# Altium PCB BBB_Board_NEW_PLANES.PcbDoc (part 1 of 4)
Units mil, origin at the board's own origin, x right, y up, seen from the top; angles counter-clockwise.
Board outline 11000 x 5000 mil, 2 copper layers (Top Layer, Bottom Layer); 103 components, 383 nets, 1066 pads, 514 vias.
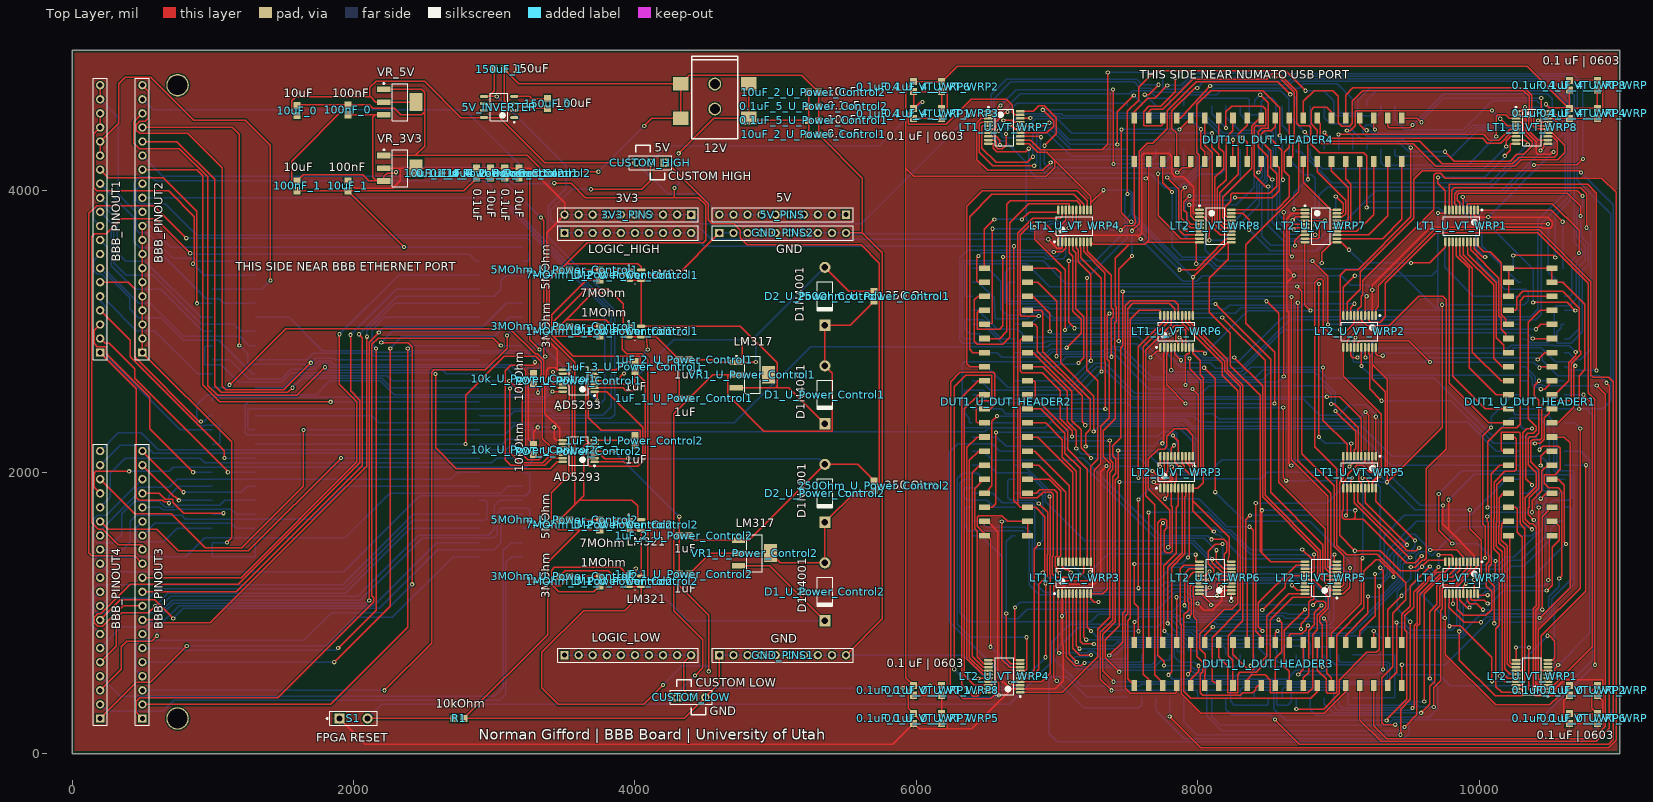
[diagram p0: Top Layer view]
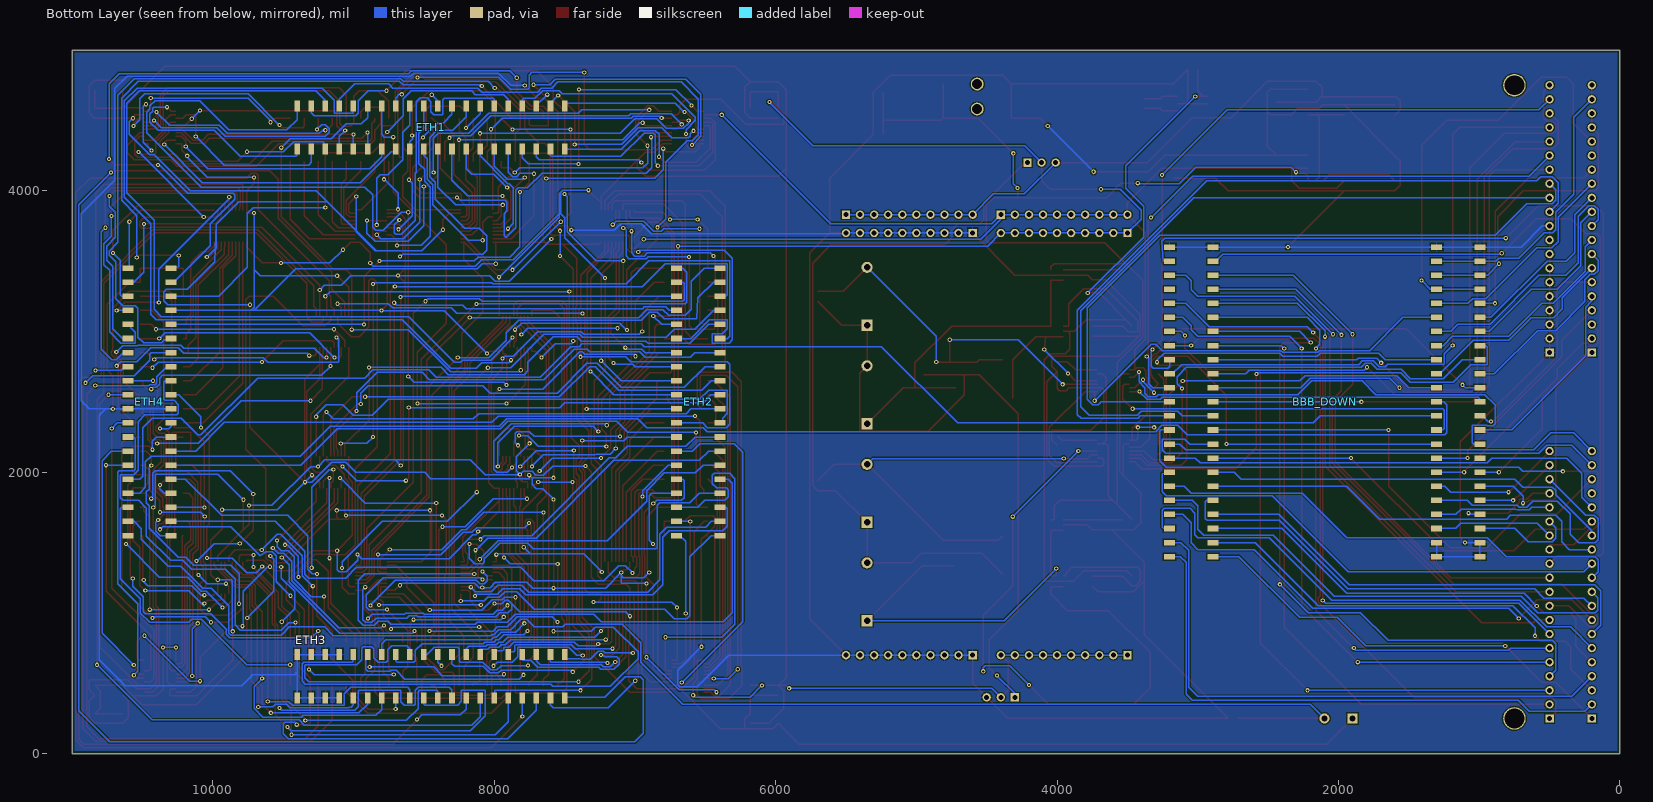
[diagram p1: Bottom Layer view, seen from below]

## Layer stack, top to bottom
Top Solder: solder mask 0.4, Solder Resist, Dk 3.5
Top Layer: signal copper 1.4
Dielectric 1: dielectric 12.6, FR-4, Dk 4.8
Bottom Layer: signal copper 1.4
Bottom Solder: solder mask 0.4, Solder Resist, Dk 3.5

## Board outline
0,0 11000,0 11000,5000 0,5000

## Design rules (kind name [scope] priority, off if disabled: settings)
BoardOutlineClearance [All] p1: gap=20
Clearance DifferentViaPadClearance [IsVia vs IsPad] p1: gap=25
Clearance SameViaPadClearance [IsVia vs IsPad] p2: gap=25
Clearance DifferentViaViaClearance [IsVia vs IsVia] p3: gap=25
Clearance SameViaViaClearance [IsVia vs IsVia] p4: gap=25
Clearance PadPadClearance [IsPad vs IsPad] p5: gap=6
Clearance GeneralClearance [All] p6: gap=8
HoleSize [All] p1: absolutevalues=TRUE maxlimit=150 minlimit=15 maxpercent=80.000 minpercent=20.000
HoleToHoleClearance [All] p1: gap=20 allowstackedmicrovias=TRUE
MinimumAnnularRing [All] p1: minimumring=7
PolygonConnect [All] p1: connectstyle=Relief reliefconductorwidth=10 reliefentries=4 polygonreliefangle="90 Angle" airgapwidth=10
RoutingVias [All] p1: holewidth=15 width=30 viastyle="Through Hole" minholewidth=28 minwidth=50 maxholewidth=28 maxwidth=50
SolderMaskExpansion [All] p1: expansion=4
Width [All] p1: maxlimit=10 minlimit=10 preferedwidth=10
28 further rules are at their usual default settings.

## Classes and differential pairs
component class BBB_Board: 3V3_PINS 5V_INVERTER 5V_PINS 10uF_0 10uF_1 12V 100nF_0 100nF_1 150uF_0 150uF_1 BBB_DOWN BBB_PINOUT1 BBB_PINOUT2 BBB_PINOUT3 BBB_PINOUT4 CUSTOM_HIGH CUSTOM_LOW GND_PINS1 GND_PINS2 LOGIC_HIGH LOGIC_LOW R1 S1 VR_3V3 VR_5V
component class U_DUT_HEADER1: DUT1_U_DUT_HEADER1
component class U_DUT_HEADER2: DUT1_U_DUT_HEADER2
component class U_DUT_HEADER3: DUT1_U_DUT_HEADER3
component class U_DUT_HEADER4: DUT1_U_DUT_HEADER4
component class U_NUMATO_HDR: ETH1 ETH2 ETH3 ETH4
component class U_Power_Control1: 0.1uF_4_U_Power_Control1 0.1uF_5_U_Power_Control1 1MOhm_U_Power_Control1 1uF_1_U_Power_Control1 1uF_2_U_Power_Control1 1uF_3_U_Power_Control1 3MOhm_U_Power_Control1 5MOhm_U_Power_Control1 7MOhm_U_Power_Control1 10k_U_Power_Control1 10uF_1_U_Power_Control1 10uF_2_U_Power_Control1 250Ohm_U_Power_Control1 D1_U_Power_Control1 D2_U_Power_Control1 LM1_U_Power_Control1 LM2_U_Power_Control1 POT_U_Power_Control1 VR1_U_Power_Control1
component class U_Power_Control2: 0.1uF_4_U_Power_Control2 0.1uF_5_U_Power_Control2 1MOhm_U_Power_Control2 1uF_1_U_Power_Control2 1uF_2_U_Power_Control2 1uF_3_U_Power_Control2 3MOhm_U_Power_Control2 5MOhm_U_Power_Control2 7MOhm_U_Power_Control2 10k_U_Power_Control2 10uF_1_U_Power_Control2 10uF_2_U_Power_Control2 250Ohm_U_Power_Control2 D1_U_Power_Control2 D2_U_Power_Control2 LM1_U_Power_Control2 LM2_U_Power_Control2 POT_U_Power_Control2 VR1_U_Power_Control2
component class U_VT_WRP1: 0.1uF_0_U_VT_WRP1 0.1uF_4_U_VT_WRP1 LT1_U_VT_WRP1 LT2_U_VT_WRP1
component class U_VT_WRP2: 0.1uF_0_U_VT_WRP2 0.1uF_4_U_VT_WRP2 LT1_U_VT_WRP2 LT2_U_VT_WRP2
component class U_VT_WRP3: 0.1uF_0_U_VT_WRP3 0.1uF_4_U_VT_WRP3 LT1_U_VT_WRP3 LT2_U_VT_WRP3
component class U_VT_WRP4: 0.1uF_0_U_VT_WRP4 0.1uF_4_U_VT_WRP4 LT1_U_VT_WRP4 LT2_U_VT_WRP4
component class U_VT_WRP5: 0.1uF_0_U_VT_WRP5 0.1uF_4_U_VT_WRP5 LT1_U_VT_WRP5 LT2_U_VT_WRP5
component class U_VT_WRP6: 0.1uF_0_U_VT_WRP6 0.1uF_4_U_VT_WRP6 LT1_U_VT_WRP6 LT2_U_VT_WRP6
component class U_VT_WRP7: 0.1uF_0_U_VT_WRP7 0.1uF_4_U_VT_WRP7 LT1_U_VT_WRP7 LT2_U_VT_WRP7
component class U_VT_WRP8: 0.1uF_0_U_VT_WRP8 0.1uF_4_U_VT_WRP8 LT1_U_VT_WRP8 LT2_U_VT_WRP8
net class FPGA_SIG[127..0]: FPGA_SIG0 FPGA_SIG1 FPGA_SIG2 FPGA_SIG3 FPGA_SIG4 FPGA_SIG5 FPGA_SIG6 FPGA_SIG7 FPGA_SIG8 FPGA_SIG9 FPGA_SIG10 FPGA_SIG11 FPGA_SIG12 FPGA_SIG13 FPGA_SIG14 FPGA_SIG15 FPGA_SIG16 FPGA_SIG17 FPGA_SIG18 FPGA_SIG19 FPGA_SIG20 FPGA_SIG21 FPGA_SIG22 FPGA_SIG23 FPGA_SIG24 FPGA_SIG25 FPGA_SIG26 FPGA_SIG27 FPGA_SIG28 FPGA_SIG29 FPGA_SIG30 FPGA_SIG31 FPGA_SIG32 FPGA_SIG33 FPGA_SIG34 FPGA_SIG35 FPGA_SIG36 FPGA_SIG37 FPGA_SIG38 FPGA_SIG39 FPGA_SIG40 FPGA_SIG41 FPGA_SIG42 FPGA_SIG43 FPGA_SIG44 FPGA_SIG45 FPGA_SIG46 FPGA_SIG47 FPGA_SIG48 FPGA_SIG49 FPGA_SIG50 FPGA_SIG51 FPGA_SIG52 FPGA_SIG53 FPGA_SIG54 FPGA_SIG55 FPGA_SIG56 FPGA_SIG57 FPGA_SIG58 FPGA_SIG59 FPGA_SIG60 FPGA_SIG61 FPGA_SIG62 FPGA_SIG63 FPGA_SIG64 FPGA_SIG65 FPGA_SIG66 FPGA_SIG67 FPGA_SIG68 FPGA_SIG69 FPGA_SIG70 FPGA_SIG71 FPGA_SIG72 FPGA_SIG73 FPGA_SIG74 FPGA_SIG75 FPGA_SIG76 FPGA_SIG77 FPGA_SIG78 FPGA_SIG79 FPGA_SIG80 FPGA_SIG81 FPGA_SIG82 FPGA_SIG83 FPGA_SIG84 FPGA_SIG85 FPGA_SIG86 FPGA_SIG87 FPGA_SIG88 FPGA_SIG89 FPGA_SIG90 FPGA_SIG91 FPGA_SIG92 FPGA_SIG93 FPGA_SIG94 FPGA_SIG95 FPGA_SIG96 FPGA_SIG97 FPGA_SIG98 FPGA_SIG99 FPGA_SIG100 FPGA_SIG101 FPGA_SIG102 FPGA_SIG103 FPGA_SIG104 FPGA_SIG105 FPGA_SIG106 FPGA_SIG107 FPGA_SIG108 FPGA_SIG109 FPGA_SIG110 FPGA_SIG111 FPGA_SIG112 FPGA_SIG113 FPGA_SIG114 FPGA_SIG115 FPGA_SIG116 FPGA_SIG117 FPGA_SIG118 FPGA_SIG119 FPGA_SIG120 FPGA_SIG121 FPGA_SIG122 FPGA_SIG123 FPGA_SIG124 FPGA_SIG125 FPGA_SIG126 FPGA_SIG127
net class OVCC_B[127..0]: OVCC_B0 OVCC_B1 OVCC_B2 OVCC_B3 OVCC_B4 OVCC_B5 OVCC_B6 OVCC_B7 OVCC_B8 OVCC_B9 OVCC_B10 OVCC_B11 OVCC_B12 OVCC_B13 OVCC_B14 OVCC_B15 OVCC_B16 OVCC_B17 OVCC_B18 OVCC_B19 OVCC_B20 OVCC_B21 OVCC_B22 OVCC_B23 OVCC_B24 OVCC_B25 OVCC_B26 OVCC_B27 OVCC_B28 OVCC_B29 OVCC_B30 OVCC_B31 OVCC_B32 OVCC_B33 OVCC_B34 OVCC_B35 OVCC_B36 OVCC_B37 OVCC_B38 OVCC_B39 OVCC_B40 OVCC_B41 OVCC_B42 OVCC_B43 OVCC_B44 OVCC_B45 OVCC_B46 OVCC_B47 OVCC_B48 OVCC_B49 OVCC_B50 OVCC_B51 OVCC_B52 OVCC_B53 OVCC_B54 OVCC_B55 OVCC_B56 OVCC_B57 OVCC_B58 OVCC_B59 OVCC_B60 OVCC_B61 OVCC_B62 OVCC_B63 OVCC_B64 OVCC_B65 OVCC_B66 OVCC_B67 OVCC_B68 OVCC_B69 OVCC_B70 OVCC_B71 OVCC_B72 OVCC_B73 OVCC_B74 OVCC_B75 OVCC_B76 OVCC_B77 OVCC_B78 OVCC_B79 OVCC_B80 OVCC_B81 OVCC_B82 OVCC_B83 OVCC_B84 OVCC_B85 OVCC_B86 OVCC_B87 OVCC_B88 OVCC_B89 OVCC_B90 OVCC_B91 OVCC_B92 OVCC_B93 OVCC_B94 OVCC_B95 OVCC_B96 OVCC_B97 OVCC_B98 OVCC_B99 OVCC_B100 OVCC_B101 OVCC_B102 OVCC_B103 OVCC_B104 OVCC_B105 OVCC_B106 OVCC_B107 OVCC_B108 OVCC_B109 OVCC_B110 OVCC_B111 OVCC_B112 OVCC_B113 OVCC_B114 OVCC_B115 OVCC_B116 OVCC_B117 OVCC_B118 OVCC_B119 OVCC_B120 OVCC_B121 OVCC_B122 OVCC_B123 OVCC_B124 OVCC_B125 OVCC_B126 OVCC_B127
channel class DUT_HEADER: U_DUT_HEADER1 U_DUT_HEADER2 U_DUT_HEADER3 U_DUT_HEADER4
channel class POW_CONT: U_Power_Control1 U_Power_Control2
channel class VT_WRP: U_VT_WRP1 U_VT_WRP2 U_VT_WRP3 U_VT_WRP4 U_VT_WRP5 U_VT_WRP6 U_VT_WRP7 U_VT_WRP8

## Components (designator, comment, footprint, x,y, rotation, side; value= is the part's Value field where it differs from the comment)
0.1uF_0_U_VT_WRP1 "0.1uF_0603" 0.1uF_0603 5980,450 r90 top (schematic designator 0.1uF_0)
0.1uF_0_U_VT_WRP2 "0.1uF_0603" 0.1uF_0603 10640,450 r90 top (schematic designator 0.1uF_0)
0.1uF_0_U_VT_WRP3 "0.1uF_0603" 0.1UF_0603 10840,450 r90 top (schematic designator 0.1uF_0)
0.1uF_0_U_VT_WRP4 "0.1uF_0603" 0.1UF_0603 10840,250 r90 top (schematic designator 0.1uF_0)
0.1uF_0_U_VT_WRP5 "0.1uF_0603" 0.1uF_0603 6180,250 r270 top (schematic designator 0.1uF_0)
0.1uF_0_U_VT_WRP6 "0.1uF_0603" 0.1uF_0603 10640,250 r90 top (schematic designator 0.1uF_0)
0.1uF_0_U_VT_WRP7 "0.1uF_0603" 0.1uF_0603 5980,250 r90 top (schematic designator 0.1uF_0)
0.1uF_0_U_VT_WRP8 "0.1uF_0603" 0.1UF_0603 6180,450 r90 top (schematic designator 0.1uF_0)
0.1uF_4_U_Power_Control1 "0.1uF_0603" 0.1UF_0603 3075,4125 r90 top (schematic designator 0.1uF_4)
0.1uF_4_U_Power_Control2 "0.1uF_0603" 0.1UF_0603 2975,4125 r90 top (schematic designator 0.1uF_4)
0.1uF_4_U_VT_WRP1 "0.1uF_0603" 0.1UF_0603 5980,4548.98 r270 top (schematic designator 0.1uF_4)
0.1uF_4_U_VT_WRP2 "0.1uF_0603" 0.1uF_0603 6180,4740 r90 top (schematic designator 0.1uF_4)
0.1uF_4_U_VT_WRP3 "0.1uF_0603" 0.1uF_0603 6180,4550 r270 top (schematic designator 0.1uF_4)
0.1uF_4_U_VT_WRP4 "0.1uF_0603" 0.1uF_0603 10640,4550 r90 top (schematic designator 0.1uF_4)
0.1uF_4_U_VT_WRP5 "0.1uF_0603" 0.1UF_0603 10840,4750 r270 top (schematic designator 0.1uF_4)
0.1uF_4_U_VT_WRP6 "0.1uF_0603" 0.1uF_0603 5980,4740 r90 top (schematic designator 0.1uF_4)
0.1uF_4_U_VT_WRP7 "0.1uF_0603" 0.1uF_0603 10840,4550 r90 top (schematic designator 0.1uF_4)
0.1uF_4_U_VT_WRP8 "0.1uF_0603" 0.1uF_0603 10640,4750 r270 top (schematic designator 0.1uF_4)
0.1uF_5_U_Power_Control1 "0.1uF_0603" 0.1UF_0603 5270,4500 r180 top (schematic designator 0.1uF_5)
0.1uF_5_U_Power_Control2 "0.1uF_0603" 0.1UF_0603 5270,4600 r180 top (schematic designator 0.1uF_5)
1MOhm_U_Power_Control1 "RNCS0603BKE10K0" 0.1UF_0603 3750,3002 r90 top (schematic designator 1MOhm)
1MOhm_U_Power_Control2 "RNCS0603BKE10K0" 0.1UF_0603 3750,1225 r90 top (schematic designator 1MOhm)
1uF_1_U_Power_Control1 "0.1uF_0603" 0.1UF_0603 4350,2525 r0 top (schematic designator 1uF_1)
1uF_1_U_Power_Control2 "0.1uF_0603" 0.1UF_0603 4350,1275 r0 top (schematic designator 1uF_1)
1uF_2_U_Power_Control1 "0.1uF_0603" 0.1UF_0603 4350,2800 r0 top (schematic designator 1uF_2)
1uF_2_U_Power_Control2 "0.1uF_0603" 0.1UF_0603 4350,1550 r0 top (schematic designator 1uF_2)
1uF_3_U_Power_Control1 "0.1uF_0603" 0.1UF_0603 4000,2750 r90 top (schematic designator 1uF_3)
1uF_3_U_Power_Control2 "0.1uF_0603" 0.1UF_0603 4000,2225 r90 top (schematic designator 1uF_3)
3MOhm_U_Power_Control1 "RNCS0603BKE10K0" 0.1UF_0603 3500,3037 r180 top (schematic designator 3MOhm)
3MOhm_U_Power_Control2 "RNCS0603BKE10K0" 0.1UF_0603 3500,1260 r180 top (schematic designator 3MOhm)
3V3_PINS "Header 10" HDR1X10 4400,3830 r180 top
5MOhm_U_Power_Control1 "RNCS0603BKE10K0" 0.1UF_0603 3500,3437 r180 top (schematic designator 5MOhm)
5MOhm_U_Power_Control2 "RNCS0603BKE10K0" 0.1UF_0603 3500,1661 r180 top (schematic designator 5MOhm)
5V_INVERTER "LTC660CS8#PBF" SOIC127P600X175-8N 3035,4595 r180 top
5V_PINS "Header 10" HDR1X10 5500,3830 r180 top
7MOhm_U_Power_Control1 "RNCS0603BKE10K0" 0.1UF_0603 3750,3402 r90 top (schematic designator 7MOhm)
7MOhm_U_Power_Control2 "RNCS0603BKE10K0" 0.1UF_0603 3750,1626 r90 top (schematic designator 7MOhm)
10k_U_Power_Control1 "RNCS0603BKE10K0" 0.1uF_0603 3280,2665 r90 top (schematic designator 10k)
10k_U_Power_Control2 "RNCS0603BKE10K0" 0.1uF_0603 3280,2160 r90 top (schematic designator 10k)
10uF_0 "0.1uF_0603" 0.1uF_0603 1600,4570 r270 top
10uF_1 "0.1uF_0603" 0.1uF_0603 1960,4035 r90 top
10uF_1_U_Power_Control1 "0.1uF_0603" 0.1UF_0603 2875,4125 r90 top (schematic designator 10uF_1)
10uF_1_U_Power_Control2 "0.1uF_0603" 0.1UF_0603 3175,4125 r90 top (schematic designator 10uF_1)
10uF_2_U_Power_Control1 "0.1uF_0603" 0.1UF_0603 5270,4400 r180 top (schematic designator 10uF_2)
10uF_2_U_Power_Control2 "0.1uF_0603" 0.1UF_0603 5270,4700 r180 top (schematic designator 10uF_2)
12V "PJ-002BH-SMT-TR" CP-002BHPJCT-ND 4745,4955 r180 top
100nF_0 "0.1uF_0603" 0.1uF_0603 1960,4575 r270 top
100nF_1 "0.1uF_0603" 0.1uF_0603 1600,4035 r90 top
150uF_0 "0.1uF_0603" 0.1uF_0603 3380,4620 r270 top
150uF_1 "0.1uF_0603" 0.1uF_0603 3035,4865 r180 top
250Ohm_U_Power_Control1 "RNCS0603BKE10K0" 0.1UF_0603 5700,3250 r270 top (schematic designator 250Ohm)
250Ohm_U_Power_Control2 "RNCS0603BKE10K0" 0.1UF_0603 5700,1904 r270 top (schematic designator 250Ohm)
BBB_DOWN "BBB_Pin" BBB_PIN 3200,3600 r180 bottom
BBB_PINOUT1 "Header 20" HDR1X20 200,2850 r90 top
BBB_PINOUT2 "Header 20" HDR1X20 500,2850 r90 top
BBB_PINOUT3 "Header 20" HDR1X20 500,250 r90 top
BBB_PINOUT4 "Header 20" HDR1X20 200,250 r90 top
CUSTOM_HIGH "Header 3" HDR1X3 4210,4200 r180 top
CUSTOM_LOW "Header 3" HDR1X3 4300,400 r0 top
D1_U_Power_Control1 "Diode 1N4001" DO-41 5350,2550 r270 top (schematic designator D1)
D1_U_Power_Control2 "Diode 1N4001" DO-41 5350,1150 r270 top (schematic designator D1)
D2_U_Power_Control1 "Diode 1N4001" DO-41 5350,3250 r270 top (schematic designator D2)
D2_U_Power_Control2 "Diode 1N4001" DO-41 5350,1850 r270 top (schematic designator D2)
DUT1_U_DUT_HEADER1 "ADAFRUIT_HEADER" FEMALE_HEADER_SMD 10362.5,2500 r90 top (schematic designator DUT1)
DUT1_U_DUT_HEADER2 "ADAFRUIT_HEADER" FEMALE_HEADER_SMD 6637.5,2500 r270 top (schematic designator DUT1)
DUT1_U_DUT_HEADER3 "ADAFRUIT_HEADER" FEMALE_HEADER_SMD 8500,637.5 r0 top (schematic designator DUT1)
DUT1_U_DUT_HEADER4 "ADAFRUIT_HEADER" FEMALE_HEADER_SMD 8500,4362.5 r180 top (schematic designator DUT1)
ETH1 "ADAFRUIT_HEADER" FEMALE_HEADER_SMD 8450,4450 r180 bottom
ETH2 "ADAFRUIT_HEADER" FEMALE_HEADER_SMD 6550,2500 r90 bottom
ETH3 "ADAFRUIT_HEADER" FEMALE_HEADER_SMD 8450,550 r0 bottom
ETH4 "ADAFRUIT_HEADER" FEMALE_HEADER_SMD 10450,2500 r270 bottom
GND_PINS1 "Header 10" HDR1X10 4600,700 r0 top
GND_PINS2 "Header 10" HDR1X10 4600,3700 r0 top
LM1_U_Power_Control1 "LM321MF/NOPB" OP_AMP 4000,3000 r0 top (schematic designator LM1)
LM1_U_Power_Control2 "LM321MF/NOPB" OP_AMP 4000,1225 r0 top (schematic designator LM1)
LM2_U_Power_Control1 "LM321MF/NOPB" OP_AMP 4000,3400 r0 top (schematic designator LM2)
LM2_U_Power_Control2 "LM321MF/NOPB" OP_AMP 4000,1625 r0 top (schematic designator LM2)
LOGIC_HIGH "Header 10" HDR1X10 3500,3700 r0 top
LOGIC_LOW "Header 10" HDR1X10 3500,700 r0 top
LT1_U_VT_WRP1 "8-Chanel Level Translator" 8-BIT_LEVEL 9875,3750 r270 top (schematic designator LT1)
LT1_U_VT_WRP2 "8-Chanel Level Translator" 8-BIT_LEVEL 9875,1250 r270 top (schematic designator LT1)
LT1_U_VT_WRP3 "8-Chanel Level Translator" 8-BIT_LEVEL 7125,1250 r90 top (schematic designator LT1)
LT1_U_VT_WRP4 "8-Chanel Level Translator" 8-BIT_LEVEL 7125,3750 r90 top (schematic designator LT1)
LT1_U_VT_WRP5 "8-Chanel Level Translator" 8-BIT_LEVEL 9150,2000 r270 top (schematic designator LT1)
LT1_U_VT_WRP6 "8-Chanel Level Translator" 8-BIT_LEVEL 7850,3000 r90 top (schematic designator LT1)
LT1_U_VT_WRP7 "8-Chanel Level Translator" 8-BIT_LEVEL 6625,4450 r0 top (schematic designator LT1)
LT1_U_VT_WRP8 "8-Chanel Level Translator" 8-BIT_LEVEL 10375,4450 r0 top (schematic designator LT1)
LT2_U_VT_WRP1 "8-Chanel Level Translator" 8-BIT_LEVEL 10375,550 r180 top (schematic designator LT2)
LT2_U_VT_WRP2 "8-Chanel Level Translator" 8-BIT_LEVEL 9150,3000 r270 top (schematic designator LT2)
LT2_U_VT_WRP3 "8-Chanel Level Translator" 8-BIT_LEVEL 7850,2000 r90 top (schematic designator LT2)
LT2_U_VT_WRP4 "8-Chanel Level Translator" 8-BIT_LEVEL 6625,550 r180 top (schematic designator LT2)
LT2_U_VT_WRP5 "8-Chanel Level Translator" 8-BIT_LEVEL 8875,1250 r180 top (schematic designator LT2)
LT2_U_VT_WRP6 "8-Chanel Level Translator" 8-BIT_LEVEL 8125,1250 r180 top (schematic designator LT2)
LT2_U_VT_WRP7 "8-Chanel Level Translator" 8-BIT_LEVEL 8875,3750 r0 top (schematic designator LT2)
LT2_U_VT_WRP8 "8-Chanel Level Translator" 8-BIT_LEVEL 8125,3750 r0 top (schematic designator LT2)
POT_U_Power_Control1 "Digital Pot" DIG_POT 3600,2650 r180 top (schematic designator POT)
POT_U_Power_Control2 "Digital Pot" DIG_POT 3600,2150 r180 top (schematic designator POT)
R1 "RNCS0603BKE10K0" 0.1UF_0603 2750,250 r180 top
S1 "SW-PB" SPST-2 2000,250 r0 top
VR1_U_Power_Control1 "Voltage Regulator" VOLT_REG 4835,2692 r0 top (schematic designator VR1)
VR1_U_Power_Control2 "Voltage Regulator" VOLT_REG 4850,1425 r0 top (schematic designator VR1)
VR_3V3 "Voltage Regulator" volt_reg 2330,4160 r0 top
VR_5V "Voltage Regulator" volt_reg 2330,4630 r0 top

## Footprints (in the part's own frame and the unit in brackets; to place one, negate y for a bottom-side part, rotate by r counter-clockwise, add the part's x,y. Pads: shape width x height; smd on the part's side, far side on the other; paste and mask are expansions set on the pad)
0.1uF_0603 [mil]
  rect 50x50 smd: 1(-35,0) 2(35,0)
0.1UF_0603 [mil]
  rect 50x50 smd: 1(-35,0) 2(35,0)
8-BIT_LEVEL [mm]
  oval 1.6x0.45 smd: 1(-2.875,2.925) 2(-2.875,2.275) 3(-2.875,1.625) 4(-2.875,0.975) 5(-2.875,0.325) 6(-2.875,-0.325) 7(-2.875,-0.975) 8(-2.875,-1.625) 9(-2.875,-2.275) 10(-2.875,-2.925) 11(2.875,-2.925) 12(2.875,-2.275) 13(2.875,-1.625) 14(2.875,-0.975) 15(2.875,-0.325) 16(2.875,0.325) 17(2.875,0.975) 18(2.875,1.625) 19(2.875,2.275) 20(2.875,2.925)
  silkscreen extent -3,-3.3 1.67,3.78, body extent -2.25,-3.3 2.25,3.3, height 1.1
BBB_PIN [mm]
  rect 2x1 smd: 1(55.986,0) 2(48.186,0) 3(55.986,-2.54) 4(48.186,-2.54) 5(55.986,-5.08) 6(48.186,-5.08) 7(55.986,-7.62) 8(48.186,-7.62) 9(55.986,-10.16) 10(48.186,-10.16) 11(55.986,-12.7) 12(48.186,-12.7) 13(55.986,-15.24) 14(48.186,-15.24) 15(55.986,-17.78) 16(48.186,-17.78) 17(55.986,-20.32) 18(48.186,-20.32) 19(55.986,-22.86) 20(48.186,-22.86) 21(55.986,-25.4) 22(48.186,-25.4) 23(55.986,-27.94) 24(48.186,-27.94) 25(55.986,-30.48) 26(48.186,-30.48) 27(55.986,-33.02) 28(48.186,-33.02) 29(55.986,-35.56) 30(48.186,-35.56) 31(55.986,-38.1) 32(48.186,-38.1) 33(55.986,-40.64) 34(48.186,-40.64) 35(55.986,-43.18) 36(48.186,-43.18) 37(55.986,-45.72) 38(48.186,-45.72) 39(55.986,-48.26) 40(48.186,-48.26) 41(55.986,-50.8) 42(48.186,-50.8) 43(55.986,-53.34) 44(48.186,-53.34) 45(55.986,-55.88) 46(48.186,-55.88) 47(7.8,0) 48(0,0) 49(7.8,-2.54) 50(0,-2.54) 51(7.8,-5.08) 52(0,-5.08) 53(7.8,-7.62) 54(0,-7.62) 56(0,-10.16) 57(7.8,-12.7) 58(0,-12.7) 59(7.8,-15.24) 60(0,-15.24) 61(7.8,-17.78) 62(0,-17.78) 63(7.8,-20.32) 64(0,-20.32) 65(7.8,-22.86) 66(0,-22.86) 67(7.8,-25.4) 68(0,-25.4) 69(7.8,-27.94) 70(0,-27.94) 71(7.8,-30.48) 72(0,-30.48) 73(7.8,-33.02) 74(0,-33.02) 75(7.8,-35.56) 76(0,-35.56) 77(7.8,-38.1) 78(0,-38.1) 79(7.8,-40.64) 80(0,-40.64) 81(7.8,-43.18) 82(0,-43.18) 83(7.8,-45.72) 84(0,-45.72) 85(7.8,-48.26) 86(0,-48.26) 87(7.8,-50.8) 88(0,-50.8) 89(7.8,-53.34) 90(0,-53.34) 91(7.8,-55.88) 92(0,-55.88)
  rect 2x1 smd mask+0.102: 55(7.8,-10.16)
CP-002BHPJCT-ND [mm] "barrel jack"
  rect 2.8x2.4 smd: 1(-1.651,11.176) 1(-1.651,4.953) 2(10.668,11.176) 2(10.668,4.953)
  round 2.311 hole 1.8 unplated: H(4.5,9.5) H(4.5,5)
  silkscreen extent 0.38,0 8.64,14.86
DIG_POT [mm]
  oval 1.55x0.45 smd: 1(-2.875,1.95) 2(-2.875,1.3) 3(-2.875,0.65) 4(-2.875,0) 5(-2.875,-0.65) 6(-2.875,-1.3) 7(-2.875,-1.95) 8(2.875,-1.95) 9(2.875,-1.3) 10(2.875,-0.65) 11(2.875,0) 12(2.875,0.65) 13(2.875,1.3) 14(2.875,1.95)
  silkscreen extent -3,-2.55 1.7,2.8, body extent -2.25,-2.55 2.25,2.55, height 1.2
DO-41 [mm] "Diode, Axial; Body 5.2 x 2.7 mm (LxDia. max), Lead Dia. 0.86 mm (max)"
  round 2 hole 1.2: 1(-5.23,0)
  rect 2x2 hole 1.2: 2(5.23,0)
  silkscreen extent -2.65,-1.4 2.75,1.4
FEMALE_HEADER_SMD [mm]
  rect 1x2 smd: 1(-24.13,-3.9) 2(-21.59,-3.9) 3(-19.05,-3.9) 4(-16.51,-3.9) 5(-13.97,-3.9) 6(-11.43,-3.9) 7(-8.89,-3.9) 8(-6.35,-3.9) 9(-3.81,-3.9) 10(-1.27,-3.9) 11(1.27,-3.9) 12(3.81,-3.9) 13(6.35,-3.9) 14(8.89,-3.9) 15(11.43,-3.9) 16(13.97,-3.9) 17(16.51,-3.9) 18(19.05,-3.9) 19(21.59,-3.9) 20(24.13,-3.9) 21(24.13,3.9) 22(21.59,3.9) 23(19.05,3.9) 24(16.51,3.9) 25(13.97,3.9) 26(11.43,3.9) 27(8.89,3.9) 28(6.35,3.9) 29(3.81,3.9) 30(1.27,3.9) 31(-1.27,3.9) 32(-3.81,3.9) 33(-6.35,3.9) 34(-8.89,3.9) 35(-11.43,3.9) 36(-13.97,3.9) 37(-16.51,3.9) 38(-19.05,3.9) 39(-21.59,3.9) 40(-24.13,3.9)
HDR1X3 [mm] "Connector; Header; 3 Position"
  rect 1.5x1.5 hole 0.9: 1(0,0)
  round 1.5 hole 0.9: 2(2.54,0) 3(5.08,0)
  silkscreen extent -1.27,-1.27 6.35,1.27
HDR1X10 [mm] "Connector; Header; 10 Position"
  rect 1.5x1.5 hole 0.9: 1(0,0)
  round 1.5 hole 0.9: 2(2.54,0) 3(5.08,0) 4(7.62,0) 5(10.16,0) 6(12.7,0) 7(15.24,0) 8(17.78,0) 9(20.32,0) 10(22.86,0)
  silkscreen extent -1.27,-1.27 24.13,1.27
HDR1X20 [mm] "Connector; Header; 20 Position"
  rect 1.5x1.5 hole 0.9: 1(0,0)
  round 1.5 hole 0.9: 2(2.54,0) 3(5.08,0) 4(7.62,0) 5(10.16,0) 6(12.7,0) 7(15.24,0) 8(17.78,0) 9(20.32,0) 10(22.86,0) 11(25.4,0) 12(27.94,0) 13(30.48,0) 14(33.02,0) 15(35.56,0) 16(38.1,0) 17(40.64,0) 18(43.18,0) 19(45.72,0) 20(48.26,0)
  silkscreen extent -1.27,-1.27 49.53,1.27
OP_AMP [mm]
  oval 1.55x0.6 smd: 1(-1.125,0.95) 2(-1.125,0) 3(-1.125,-0.95) 4(1.125,-0.95) 5(1.125,0.95)
  silkscreen extent -1.25,-1.55 0.05,1.92, body extent -0.9,-1.55 0.9,1.55, height 1.45
SOIC127P600X175-8N [mm] "SOIC, 8-Leads, Body 4.90x3.90mm, Pitch 1.27mm, IPC Medium Density"
  oval 1.45x0.6 smd: 1(-2.725,1.905) 2(-2.725,0.635) 3(-2.725,-0.635) 4(-2.725,-1.905) 5(2.725,-1.905) 6(2.725,-0.635) 7(2.725,0.635) 8(2.725,1.905)
  silkscreen extent -2.85,-2.5 1.6,2.88, body extent -2,-2.5 2,2.5, height 1.76
SPST-2 [mm] "Switch; 2 Leads"
  rect 1.85x1.85 hole 1.1: 1(-2.54,0)
  round 1.85 hole 1.1: 2(2.54,0)
  silkscreen extent -4.89,-1.27 4.28,1.27
VOLT_REG [mm] "SOT223, 4-Leads, Body 6.50x7.00mm (avg), Pitch 2.30mm, IPC Medium Density"
  rect 2.4x1 smd: 1(-2.9,2.3) 2(-2.9,0) 3(-2.9,-2.3)
  rect 2.4x3.2 smd: 4(2.9,0)
  silkscreen extent -3.02,-3.35 1.4,3.47, body extent -1.85,-3.35 1.85,3.35, height 1.8
volt_reg [mm] "SOT223, 4-Leads, Body 6.50x7.00mm (avg), Pitch 2.30mm, IPC Medium Density"
  rect 2.4x1 smd: 1(-2.9,2.3) 2(-2.9,0) 3(-2.9,-2.3)
  rect 2.4x3.2 smd: 4(2.9,0)
  silkscreen extent -3.02,-3.35 1.4,3.47, body extent -1.85,-3.35 1.85,3.35, height 1.8

## Part data
1MOhm_U_Power_Control1 1MOhm_U_Power_Control2 3MOhm_U_Power_Control1 3MOhm_U_Power_Control2 5MOhm_U_Power_Control1 5MOhm_U_Power_Control2 7MOhm_U_Power_Control1 7MOhm_U_Power_Control2 10k_U_Power_Control1 10k_U_Power_Control2 250Ohm_U_Power_Control1 250Ohm_U_Power_Control2 R1: "RES 10K OHM 1/16W 0.1% 0603"
3V3_PINS 5V_PINS GND_PINS1 GND_PINS2 LOGIC_HIGH LOGIC_LOW: "Header, 10-Pin"
5V_INVERTER: "IC REG SWTCHD CAP INV 0.1A 8SOIC"
12V: "CONN POWER JACK 2.5X5.5MM HI CUR"
BBB_PINOUT1 BBB_PINOUT2 BBB_PINOUT3 BBB_PINOUT4: "Header, 20-Pin"
CUSTOM_HIGH CUSTOM_LOW: "Header, 3-Pin"
D1_U_Power_Control1 D1_U_Power_Control2 D2_U_Power_Control1 D2_U_Power_Control2: "1 Amp General Purpose Rectifier"
DUT1_U_DUT_HEADER1 DUT1_U_DUT_HEADER2 DUT1_U_DUT_HEADER3 DUT1_U_DUT_HEADER4 ETH1 ETH2 ETH3 ETH4: "Extra tall female header (SMD)"
LM1_U_Power_Control1 LM1_U_Power_Control2 LM2_U_Power_Control1 LM2_U_Power_Control2: "IC OPAMP GP 1MHZ SOT23-5"
LT1_U_VT_WRP1 LT1_U_VT_WRP2 LT1_U_VT_WRP3 LT1_U_VT_WRP4 LT1_U_VT_WRP5 LT1_U_VT_WRP6 LT1_U_VT_WRP7 LT1_U_VT_WRP8 LT2_U_VT_WRP1 LT2_U_VT_WRP2 LT2_U_VT_WRP3 LT2_U_VT_WRP4 LT2_U_VT_WRP5 LT2_U_VT_WRP6 LT2_U_VT_WRP7 LT2_U_VT_WRP8: "IC XLATR LEVEL BIDIR 8CH 20TSSOP"
POT_U_Power_Control1 POT_U_Power_Control2: "IC DGTL POT 1024POS 20K 14TSSOP"
S1: "Switch"
VR1_U_Power_Control1 VR1_U_Power_Control2 VR_3V3 VR_5V: "IC REG LDO ADJ 1.5A DDPAK"

## Free pads (board coordinates)
  round 160 hole 140 unplated: 0(750,250) 0(750,4750)

## Via types
v1: diameter 30, hole 15, Top Layer to Bottom Layer, 514 vias

## Nets (pads, with @x,y where several pads share a name; then routed paths per layer and width w, separated by ;. In a path a pad name is that pad's centre, name@x,y a point inside that pad or via, vN(x,y) a via of type N, cw(c..) or ccw(c..) an arc to the next point about the centre after c; other vN are vias at no path point)
3V3_W_U_Power_Control1: 0.1uF_0_U_VT_WRP1.1 0.1uF_0_U_VT_WRP2.1 0.1uF_0_U_VT_WRP3.1 0.1uF_0_U_VT_WRP4.1 0.1uF_0_U_VT_WRP5.1 0.1uF_0_U_VT_WRP6.1 0.1uF_0_U_VT_WRP7.1 0.1uF_0_U_VT_WRP8.1 0.1uF_4_U_Power_Control1.2 0.1uF_4_U_Power_Control2.2 3V3_PINS.1 3V3_PINS.2 3V3_PINS.3 3V3_PINS.4 3V3_PINS.5 3V3_PINS.6 3V3_PINS.7 3V3_PINS.8 3V3_PINS.9 3V3_PINS.10 10k_U_Power_Control1.2 10k_U_Power_Control2.2 10uF_1.2 10uF_1_U_Power_Control1.2 10uF_1_U_Power_Control2.2 DUT1_U_DUT_HEADER2.19 LT1_U_VT_WRP1.2 LT1_U_VT_WRP2.2 LT1_U_VT_WRP3.2 LT1_U_VT_WRP4.2 LT1_U_VT_WRP5.2 LT1_U_VT_WRP6.2 LT1_U_VT_WRP7.2 LT1_U_VT_WRP8.2 LT2_U_VT_WRP1.2 LT2_U_VT_WRP2.2 LT2_U_VT_WRP3.2 LT2_U_VT_WRP4.2 LT2_U_VT_WRP5.2 LT2_U_VT_WRP6.2 LT2_U_VT_WRP7.2 LT2_U_VT_WRP8.2 POT_U_Power_Control1.8 POT_U_Power_Control2.8 S1.1 VR_3V3.2 VR_3V3.4 | length 40754.2
  Top Layer w10: S1.1@1900,250 2084,66 5831,66 0.1uF_0_U_VT_WRP7.1@5980,215 6019,176 6218,176 ; 10uF_1.2@1960,4070 2011,4019 2279,4019 2332,4072 2332,4149.07 2321.07,4160 ; VR_3V3.2@2215.83,4160 2321.07,4160 ; 10k_U_Power_Control1.2@3280,2700 3242,2662 3242,2233 10k_U_Power_Control2.2@3280,2195 3280,2289 v1(3310,2319) ; v1(3426,2319) 3426,2240 3439.23,2226.77 POT_U_Power_Control2.8@3465,2226.77 ; POT_U_Power_Control2.8@3486.81,2226.77 POT_U_Power_Control2.8@3465,2226.77 ; POT_U_Power_Control1.8@3486.81,2726.77 3447,2726.77 ; 0.1uF_0_U_VT_WRP1.1@5980,415 0.1uF_0_U_VT_WRP8.1@6180,415 0.1uF_0_U_VT_WRP5.1@6180,285 6218,247 6218,176 ; v1(6383,4539.57) LT1_U_VT_WRP7.2@6511.81,4539.57 ; DUT1_U_DUT_HEADER2.19@6483.96,1650 6507,1650 6579,1578 6579,548 6666.57,460.43 6677,460.43 ; v1(6937,3655) 7000,3592 7035.43,3592 LT1_U_VT_WRP4.2@7035.43,3636.81 7035.43,3670.43 7050,3685 7566,3685 ; v1(7351,2044) 7311,2004 7311,1254.17 7261.83,1205 7060,1205 7035.43,1180.43 LT1_U_VT_WRP3.2@7035.43,1136.81 v1(7035.43,977) 7035.43,776.57 7043,769 7043,517 6986.43,460.43 LT2_U_VT_WRP4.2@6738.19,460.43 6677,460.43 ; v1(7594,3657) 7566,3685 ; v1(7748,2205) 7756.72,2213.72 7756.72,2853.66 7760.43,2857.37 LT1_U_VT_WRP6.2@7760.43,2886.81 ; LT2_U_VT_WRP3.2@7760.43,1886.81 7760.43,1926.43 7766,1932 ; v1(7998,1066) 8044,1020 8104,1020 8170,1086 8170,1146.43 8184,1160.43 LT2_U_VT_WRP6.2@8238.19,1160.43 ; LT2_U_VT_WRP8.2@8011.81,3839.57 7977.75,3839.57 7967.31,3850 7967.31,3933.31 7970,3936 7970,4025 7895,4100 7841,4100 7814,4127 7814,4245 7793,4266 7620,4266 7602,4248 7602,3697 7590,3685 7566,3685 ; v1(8664,2047) 8646,2065 8646,3137 8632,3151 ; LT2_U_VT_WRP7.2@8761.81,3839.57 8668.91,3839.57 8631,3801.66 ; v1(8916,1183) 8938.57,1160.43 LT2_U_VT_WRP5.2@8988.19,1160.43 ; LT1_U_VT_WRP5.2@9239.57,2113.19 9239.57,2052.43 v1(9252,2040) ; LT2_U_VT_WRP2.2@9239.57,3113.19 v1(9239.57,3294.43) 9239.57,3327.57 9653,3741 10442.91,3741 10448.91,3735 10503.84,3735 10519,3750.16 10519,3779.84 10486.84,3812 v1@10064,3812 ; v1(9742,1764) 9742,1630.57 9782,1590.57 ; v1(9782,1804) 9782,1590.57 ; LT1_U_VT_WRP2.2@9964.57,1363.19 9964.57,1408 9782,1590.57 ; LT1_U_VT_WRP1.2@9964.57,3863.19 9964.57,3828.43 9981,3812 v1@10064,3812 ; v1(10064,3813) v1@10064,3812 ; LT1_U_VT_WRP8.2@10261.81,4539.57 10300,4539.57 10333,4506.57 10333,4420 10406,4347 10406,4271 10419,4258 10509,4258 v1(10527,4276) ; v1(10423,1749) 10423,1040.32 10400,1017.32 10400,503.43 10443,460.43 LT2_U_VT_WRP1.2@10488.19,460.43 10539.43,460.43 10603,524 10877,524 10879,522 10879,454 0.1uF_0_U_VT_WRP3.1@10840,415 10879,376 10879,254 0.1uF_0_U_VT_WRP4.1@10840,215 0.1uF_0_U_VT_WRP6.1@10640,215 10601,254 10601,376 0.1uF_0_U_VT_WRP2.1@10640,415 ; 2321.07,4160 VR_3V3.4@2444.17,4160 10uF_1_U_Power_Control1.2@2875,4160 0.1uF_4_U_Power_Control2.2@2975,4160 0.1uF_4_U_Power_Control1.2@3075,4160 10uF_1_U_Power_Control2.2@3175,4160 3256,4160 3500,3916 3V3_PINS.10@3500,3830 3372,3702 3372,2946 3447,2871 3447,2726.77 ; 3447,2726.77 3432.77,2741 3388.85,2741 3369,2721.15 3369,2676.6 3361,2668.6 3361,2417 3465,2313 POT_U_Power_Control2.8@3465,2226.77 ; 6218,176 6392.57,176 6677,460.43 ; 7766,1932 7767,1933 7799.49,1933 ; 7766,1932 7798.49,1932 7799.49,1933 ; 7799.49,1933 7818,1951.51 v1(7818,1984) 7799.49,1965.49 7799.49,1933 ; 8631,3801.66 8631.54,3448.46 ; 8631,3801.66 8631,3449 8631.54,3448.46 ; 8631.54,3448.46 v1(8683,3397) 8632,3346 8632,3151 ; 8631.54,3448.46 8632,3151
  Bottom Layer w10: v1(3310,2319) v1(3426,2319) ; 3V3_PINS.10@3500,3830 3V3_PINS.9@3600,3830 3V3_PINS.8@3700,3830 3V3_PINS.7@3800,3830 3V3_PINS.6@3900,3830 3V3_PINS.5@4000,3830 3V3_PINS.4@4100,3830 3V3_PINS.3@4200,3830 3V3_PINS.2@4300,3830 3V3_PINS.1@4400,3830 ; v1(6383,4539.57) 5609.43,3766 4464,3766 3V3_PINS.1@4400,3830 ; v1(6937,3655) 4541,3655 4400,3796 3V3_PINS.1@4400,3830 ; v1(7035.43,977) 7066.43,1008 7819,1008 7876,1065 ; v1(7351,2044) 7585.66,2044 7649.66,1980 7704.34,1980 7731.34,2007 7795,2007 v1(7818,1984) ; v1(7594,3657) 7893,3358 7993,3358 8032,3397 v1(8683,3397) 9019,3397 9088,3328 9206,3328 v1(9239.57,3294.43) ; v1(7748,2205) 7844,2109 7844,2010 v1(7818,1984) ; v1(7998,1066) 7945,1066 7922,1089 7900,1089 7876,1065 ; v1(8664,2047) 8704,2087 ; v1(8916,1183) 8935,1164 8935,953 8914,932 8869,932 8839,962 8620,962 8602,980 8553,980 8544,971 7989,971 7960,1000 7902,1000 7876,1026 7876,1065 ; v1(9742,1764) 9579,1764 9303,2040 v1(9252,2040) 9205,2087 8704,2087 ; v1(9782,1804) 9964,1986 10403.66,1986 10407,1982.66 10407,1765 v1(10423,1749) ; v1(10064,3813) v1(10527,4276) ; v1(7818,1984) 7821,1981 8062.63,1981 8168.63,2087 8704,2087
12V_W_U_Power_Control1: 0.1uF_5_U_Power_Control1.2 0.1uF_5_U_Power_Control2.2 5MOhm_U_Power_Control1.2 5MOhm_U_Power_Control2.2 10uF_2_U_Power_Control1.2 10uF_2_U_Power_Control2.2 12V.1 100nF_0.2 100nF_1.2 LM2_U_Power_Control1.5 LM2_U_Power_Control2.5 POT_U_Power_Control1.6 POT_U_Power_Control2.6 VR_3V3.3 VR_5V.3 | length 11265.6
  Top Layer w10: 100nF_1.2@1600,4070 1642,4112 2066.45,4112 2109,4069.45 2165.55,4069.45 ; 100nF_0.2@1960,4540 2087.55,4539.45 2155,4539.45 ; VR_5V.3@2215.83,4539.45 2155,4539.45 ; v1(2303,4132) 2297,4126 2239,4126 2215.83,4102.83 VR_3V3.3@2215.83,4069.45 2165.55,4069.45 ; v1(3427,4054) 3546,4054 3648.23,3951.77 4279,3951.77 ; 5MOhm_U_Power_Control2.2@3465,1661 3574,1770 ; POT_U_Power_Control2.6@3713.19,2201.18 3680,2201.18 ; POT_U_Power_Control1.6@3713.19,2701.18 3680,2701.18 3651,2672.18 3651,2230.18 3680,2201.18 ; LM2_U_Power_Control2.5@4044.29,1662.4 4019,1662.4 4019,1760 3979,1800 3604,1800 ; LM2_U_Power_Control1.5@4044.29,3437.4 4044,3437.4 4044,3460 4021,3483 3511,3483 ; v1(4281,4020) 4281,3953.77 4279,3951.77 ; v1(4311,4266) 4560,4515 12V.1@4810,4515 ; 12V.1@4810,4760 12V.1@4810,4515 ; 10uF_2_U_Power_Control1.2@5235,4400 0.1uF_5_U_Power_Control1.2@5235,4500 ; 10uF_2_U_Power_Control2.2@5235,4700 0.1uF_5_U_Power_Control2.2@5235,4600 0.1uF_5_U_Power_Control1.2@5235,4500 ; 2155,4539.45 2137.58,4522.03 2137.58,4097.42 2165.55,4069.45 ; 3511,3483 3660,3632 4485,3632 4503,3650 4503,3899.54 4450.77,3951.77 4279,3951.77 ; 3511,3483 5MOhm_U_Power_Control1.2@3465,3437 3391,3363 3391,2963 3574,2780 3574,1770 ; 3574,1770 3604,1800 ; 3604,1800 3636,1832 3636,2183 3654.18,2201.18 3680,2201.18 ; 12V.1@4810,4515 4825,4500 0.1uF_5_U_Power_Control1.2@5235,4500
  Bottom Layer w10: v1(2303,4132) 2337,4166 3015,4166 3131,4050 3423,4050 v1(3427,4054) ; v1(4281,4020) 4311,4050 v1(4311,4266)
-5V_W_U_Power_Control1: 3MOhm_U_Power_Control1.2 3MOhm_U_Power_Control2.2 5V_INVERTER.5 150uF_1.2 LM1_U_Power_Control1.2 LM1_U_Power_Control2.2 | length 5598.3
  Top Layer w10: 5V_INVERTER.5@2927.72,4670 2960,4670 ; 150uF_1.2@3000,4865 3000,4710 2960,4670 ; v1(3018,4670) 2960,4670 ; 3MOhm_U_Power_Control2.2@3465,1260 3504,1299 3811,1299 3885,1225 LM1_U_Power_Control2.2@3955.71,1225 4080,1225 4092,1237 4092,2800 4050,2842 3941,2842 3911,2872 3911,2989 3922,3000 ; 3MOhm_U_Power_Control1.2@3465,3037 3512,3084 ; v1(3782,3274) 3702,3274 3512,3084 ; LM1_U_Power_Control1.2@3955.71,3000 3922,3000 ; 3512,3084 3794,3084 3878,3000 3922,3000
  Bottom Layer w10: v1(3018,4670) 3512,4176 3512,4017 3385,3890 3385,3671 v1(3782,3274)
BBB_AIN0: BBB_DOWN.39 BBB_PINOUT3.17 | length 731.2
  Top Layer w10: BBB_PINOUT3.17@500,1850 621,1850 663,1808 717,1808 717,1786 794,1709 v1(1076,1709)
  Bottom Layer w10: BBB_DOWN.39@995.83,1700 1067,1700 v1(1076,1709)
BBB_AIN1: BBB_DOWN.40 BBB_PINOUT3.16 | length 827.8
  Bottom Layer w10: BBB_PINOUT3.16@500,1750 627,1750 644,1733 734,1733 739,1738 1129,1738 1167,1700 BBB_DOWN.40@1302.91,1700
BBB_AIN2: BBB_DOWN.37 BBB_PINOUT3.19 | length 599.4
  Top Layer w10: BBB_PINOUT3.19@500,2050 726.11,1823.89 735,1823.89 v1(758.89,1800)
  Bottom Layer w10: v1(758.89,1800) BBB_DOWN.37@995.83,1800
BBB_AIN3: BBB_DOWN.38 BBB_PINOUT3.18 | length 2007.7
  Bottom Layer w10: BBB_PINOUT3.18@500,1950 244,1694 181,1694 156,1669 156,1521 177,1500 294,1500 354,1560 354,1703 445,1794 619,1794 662,1751 716,1751 729,1764 1049,1764 1085,1800 BBB_DOWN.38@1302.91,1800
BBB_AIN4: BBB_DOWN.33 BBB_PINOUT1.3 | length 1531.1
  Top Layer w10: BBB_PINOUT1.3@200,3050 157,3007 157,2916 180,2893 243,2893 243,2840 552,2531 552,2309 v1(861,2000)
  Bottom Layer w10: v1(861,2000) BBB_DOWN.33@995.83,2000
BBB_AIN5: BBB_DOWN.36 BBB_PINOUT3.20 | length 941.3
  Top Layer w10: BBB_PINOUT3.20@500,2150 v1(792,1858)
  Bottom Layer w10: v1(792,1858) 1202,1858 1244,1900 BBB_DOWN.36@1302.91,1900
BBB_AIN6: BBB_DOWN.35 BBB_PINOUT1.1 | length 1770.2
  Top Layer w10: BBB_PINOUT1.1@200,2850 457,2593 457,1820 477,1800 644.88,1800 655.88,1789 680,1789 v1(689,1780)
  Bottom Layer w10: v1(689,1780) 689,1828.98 760.02,1900 BBB_DOWN.35@995.83,1900
BBB_DCS_DATA1: BBB_DOWN.92 BBB_PINOUT4.2 | length 4025.2
  Bottom Layer w10: BBB_PINOUT4.2@200,350 250,300 643,300 723,380 3040,380 3083,423 3083,1360 3123,1400 BBB_DOWN.92@3200,1400
BBB_ECAPWMO: BBB_DOWN.42 BBB_PINOUT3.14 | length 854.3
  Bottom Layer w10: BBB_PINOUT3.14@500,1550 587,1637 1130,1637 1167,1600 BBB_DOWN.42@1302.91,1600
BBB_EHRPWM1A: BBB_DOWN.14 BBB_PINOUT1.10 | length 1857.6
  Bottom Layer w10: BBB_PINOUT1.10@200,3750 156,3794 156,3869 181,3894 221.5,3894 298,3817.5 298,3488.29 386.29,3400 576,3400 923,3053 1151,3053 1204,3000 BBB_DOWN.14@1302.91,3000
BBB_EHRPWM1B: BBB_DOWN.16 BBB_PINOUT1.9 | length 1515.8
  Bottom Layer w10: BBB_PINOUT1.9@200,3650 248,3602 248,3427.46 475.46,3200 557,3200 791,2966 1190.89,2966 1256.89,2900 BBB_DOWN.16@1302.91,2900
BBB_EHRPWM2A: BBB_DOWN.65 BBB_PINOUT2.18 | length 4404.7
  Top Layer w10: BBB_PINOUT2.18@500,4550 439,4489 439,4338 477,4300 762,4300 963,4099 963,2616 1033.75,2545.25 1596.25,2545.25 v1(1797,2746)
  Bottom Layer w10: v1(1797,2746) 1818,2725 2634,2725 2659,2700 BBB_DOWN.65@2892.91,2700
BBB_EHRPWM2B: BBB_DOWN.59 BBB_PINOUT3.4 | length 5034.1
  Top Layer w10: v1(2197,2921) 2388,2921 2417,2892 v1(2417,1203)
  Bottom Layer w10: BBB_PINOUT3.4@500,550 456,594 456,780 480,804 1647,804 1845,1002 2216,1002 v1(2417,1203) ; v1(2197,2921) 2276,3000 BBB_DOWN.59@2892.91,3000
BBB_GND_ADC: BBB_DOWN.34 BBB_PINOUT1.2 | length 1538.7
  Top Layer w10: BBB_PINOUT1.2@200,2950 235.43,2914.57 264.57,2914.57 445,2734.14 445,2667.38 1107,2005.38 v1(1107,2000)
  Bottom Layer w10: v1(1107,2000) BBB_DOWN.34@1302.91,2000
BBB_GPIO_20: BBB_DOWN.41 BBB_PINOUT3.15 | length 726.3
  Bottom Layer w10: BBB_PINOUT3.15@500,1650 456,1606 456,1531 481,1506 652,1506 746,1600 BBB_DOWN.41@995.83,1600
BBB_GPIO_26: BBB_DOWN.60 BBB_PINOUT3.3 | length 4938.9
  Top Layer w10: v1(2220,450) 2555,785 2555,2712 2570,2727 2938,2727 3091,2880 v1(3091,2972)
  Bottom Layer w10: BBB_PINOUT3.3@500,450 v1(2220,450) ; v1(3091,2972) 3119,3000 BBB_DOWN.60@3200,3000
BBB_GPIO_27: BBB_DOWN.63 BBB_PINOUT2.20 | length 4600.8
  Top Layer w10: BBB_PINOUT2.20@500,4750 543,4707 543,4515.53 520,4492.53 480,4492.53 457.47,4470 457.47,4430 480,4407.47 821.53,4407.47 1067,4162 1067,2612 1093,2586 1506,2586 v1(1697,2777)
  Bottom Layer w10: v1(1697,2777) 1730,2810 1861,2810 1871,2800 BBB_DOWN.63@2892.91,2800
BBB_GPIO_44: BBB_DOWN.58 BBB_PINOUT3.5 | length 4803.2
  Top Layer w10: v1(1863,650) 2262,1049 v1(2262,2880)
  Bottom Layer w10: BBB_PINOUT3.5@500,650 v1(1863,650) ; v1(2262,2880) 2348,2966 3000,2966 3047,3013 3047,3040 3107,3100 BBB_DOWN.58@3200,3100
BBB_GPIO_45: BBB_DOWN.57 BBB_PINOUT3.6 | length 4584.5
  Top Layer w10: v1(1891.28,750) 2161,1019.72 v1(2161,2879)
  Bottom Layer w10: BBB_PINOUT3.6@500,750 777.39,750 791,736.39 1877.67,736.39 v1(1891.28,750) ; v1(2161,2879) 2132,2908 2132,3010 2222,3100 BBB_DOWN.57@2892.91,3100
BBB_GPIO_46: BBB_DOWN.62 BBB_PINOUT3.1 | length 5064.8
  Top Layer w10: BBB_PINOUT3.1@500,250 457,293 457,373 480,396 1461,396 2143,1078 2143,1108 2130,1121 2130,2908 2174.98,2952.98 2994.02,2952.98 v1(3047,2900)
  Bottom Layer w10: v1(3047,2900) BBB_DOWN.62@3200,2900
BBB_GPIO_47: BBB_DOWN.61 BBB_PINOUT3.2 | length 4609.8
  Top Layer w10: BBB_PINOUT3.2@500,350 1838.33,350 2386,897.67 v1(2386,2879)
  Bottom Layer w10: v1(2386,2879) 2407,2900 BBB_DOWN.61@2892.91,2900
BBB_GPIO_61: BBB_DOWN.72 BBB_PINOUT2.11 | length 5474.3
  Bottom Layer w10: BBB_PINOUT2.11@500,3850 438,3912 438,4058 480,4100 563,4100 592,4071 2936,4071 3854.98,3152.02 3854.98,2409.98 3830,2385 3424,2385 3409,2400 BBB_DOWN.72@3200,2400
BBB_GPIO_65: BBB_DOWN.64 BBB_PINOUT2.19 | length 4559.6
  Top Layer w10: v1(3254,4112) 3254,2940 v1(3322.38,2871.62)
  Bottom Layer w10: BBB_PINOUT2.19@500,4650 576,4574 2792,4574 v1(3254,4112) ; BBB_DOWN.64@3200,2800 3200,2752 3215,2737 3315,2737 3331,2753 3331,2863 v1(3322.38,2871.62)
BBB_GPIO_66: BBB_DOWN.53 BBB_PINOUT3.9 | length 4779.5
  Top Layer w10: BBB_PINOUT3.9@500,1050 363,1050 219,906 181,906 157,930 157,970 181,994 204.14,994 414.14,1204 1182.14,1204 2045,2066.86 2045,2512 1979,2578 v1(1979,2976)
  Bottom Layer w10: v1(1979,2976) 2303,3300 BBB_DOWN.53@2892.91,3300
BBB_GPIO_67: BBB_DOWN.54
BBB_GPIO_68: BBB_DOWN.56 BBB_PINOUT3.7 | length 4748.3
  Top Layer w10: v1(2112,1089) 2112,2924 v1(2180,2992)
  Bottom Layer w10: BBB_PINOUT3.7@500,850 719.41,1069.41 2092.41,1069.41 v1(2112,1089) ; v1(2180,2992) 2221,3033 2920,3033 3087,3200 BBB_DOWN.56@3200,3200
BBB_GPIO_69: BBB_DOWN.55 BBB_PINOUT3.8 | length 3902
  Top Layer w10: BBB_PINOUT3.8@500,950 597.85,950 616.85,931 981.29,931 2093,2042.71 2093,2960 v1(2096,2963)
  Bottom Layer w10: v1(2096,2963) 2096,3004 2292,3200 BBB_DOWN.55@2892.91,3200
BBB_GPIO_115: BBB_DOWN.27 BBB_PINOUT1.5 | length 1411.9
  Bottom Layer w10: BBB_PINOUT1.5@200,3250 200,3217 244,3173 244,2826 770,2300 BBB_DOWN.27@995.83,2300
BBB_GPIO_117: BBB_DOWN.25 BBB_PINOUT1.6 | length 1506.6
  Top Layer w10: BBB_PINOUT1.6@200,3350 400,3350 445,3305 445,2820 905,2360 v1(917,2360)
  Bottom Layer w10: v1(917,2360) 936,2360 976,2400 BBB_DOWN.25@995.83,2400
BBB_I2C2_SCL: BBB_DOWN.19 BBB_PINOUT1.8 | length 1370.6
  Bottom Layer w10: BBB_PINOUT1.8@200,3550 156,3506 156,3431 181,3406 212,3406 249,3369 249,3214 457,3006 586,3006 892,2700 BBB_DOWN.19@995.83,2700
BBB_I2C_SDA: BBB_DOWN.20 BBB_PINOUT1.7 | length 1460.4
  Bottom Layer w10: BBB_PINOUT1.7@200,3450 410,3240 410,3160 472,3098 630,3098 791,2937 1042.22,2937 1279.22,2700 BBB_DOWN.20@1302.91,2700
BBB_LCD_AC_BIAS: BBB_DOWN.76 BBB_PINOUT4.20 | length 3121.8
  Bottom Layer w10: BBB_PINOUT4.20@200,2150 330,2280 491.98,2280 613.98,2158 3085,2158 3127,2200 BBB_DOWN.76@3200,2200
BBB_LCD_DATA0: BBB_DOWN.91 BBB_PINOUT4.1 | length 3169.3
  Top Layer w10: BBB_PINOUT4.1@200,250 456,506 556,506 v1(815,765)
  Bottom Layer w10: v1(815,765) 1807,765 2010,968 2276,968 2708,1400 BBB_DOWN.91@2892.91,1400
BBB_LCD_DATA2: BBB_DOWN.89 BBB_PINOUT4.3 | length 3254.6
  Top Layer w10: BBB_PINOUT4.3@200,450 350,600 350,760 390,800 566,800 v1(603,837)
  Bottom Layer w10: v1(603,837) 603,893.41 761,1051.41 2142.41,1051.41 2591,1500 BBB_DOWN.89@2892.91,1500
BBB_LCD_DATA3: BBB_DOWN.90 BBB_PINOUT4.4 | length 4081.9
  Bottom Layer w10: BBB_PINOUT4.4@200,550 343,407 3000,407 3065,472 3065,1445 3120,1500 BBB_DOWN.90@3200,1500
BBB_LCD_DATA4: BBB_DOWN.87 BBB_PINOUT4.5 | length 3201.8
  Top Layer w10: BBB_PINOUT4.5@200,650 313,763 313,960 353,1000 542,1000 v1(591,1049)
  Bottom Layer w10: v1(591,1049) 680,1138 1942,1138 2404,1600 BBB_DOWN.87@2892.91,1600
BBB_LCD_DATA5: BBB_DOWN.88 BBB_PINOUT4.6 | length 3738.2
  Bottom Layer w10: BBB_PINOUT4.6@200,750 350,900 522,900 711,1089 2048.78,1089 2493.78,1534 3001,1534 3021,1554 3021,1710 3054,1743 3240,1743 3253,1730 3253,1610 3243,1600 BBB_DOWN.88@3200,1600
BBB_LCD_DATA6: BBB_DOWN.85 BBB_PINOUT4.7 | length 3313.7
  Bottom Layer w10: BBB_PINOUT4.7@200,850 138,912 138,1159 179,1200 1925.12,1200 2425.12,1700 BBB_DOWN.85@2892.91,1700
BBB_LCD_DATA7: BBB_DOWN.86 BBB_PINOUT4.8 | length 3503.8
  Top Layer w10: BBB_PINOUT4.8@200,950 343,1093 587.27,1093 v1(719.27,961)
  Bottom Layer w10: v1(719.27,961) 791.27,1033 2182,1033 2599,1450 3000,1450 3047,1497 3047,1640 3107,1700 BBB_DOWN.86@3200,1700
BBB_LCD_DATA8: BBB_DOWN.83 BBB_PINOUT4.9 | length 3180
  Bottom Layer w10: BBB_PINOUT4.9@200,1050 256,1106 542,1106 607,1171 1934.98,1171 2420.98,1657 2933,1657 2946,1670 2946,1790 2936,1800 BBB_DOWN.83@2892.91,1800
BBB_LCD_DATA9: BBB_DOWN.84 BBB_PINOUT4.10 | length 3628.3
  Bottom Layer w10: BBB_PINOUT4.10@200,1150 157,1107 157,1020 177,1000 583.46,1000 702.46,1119 2029.39,1119 2462.39,1552 2959,1552 3000,1593 3000,1760 3040,1800 BBB_DOWN.84@3200,1800
BBB_LCD_DATA10: BBB_DOWN.82 BBB_PINOUT4.11 | length 3407
  Bottom Layer w10: BBB_PINOUT4.11@200,1250 156,1294 156,1379 177,1400 808,1400 942,1534 1942,1534 2259,1851 3047,1851 3096,1900 BBB_DOWN.82@3200,1900
BBB_LCD_DATA11: BBB_DOWN.80 BBB_PINOUT4.12 | length 3495.4
  Bottom Layer w10: BBB_PINOUT4.12@200,1350 257,1293 1929.5,1293 2469.19,1832.69 3225.69,1832.69 3253,1860 3253,1990 BBB_DOWN.80@3200,2000
BBB_LCD_DATA12: BBB_DOWN.81 BBB_PINOUT4.13 | length 2987.2
  Bottom Layer w10: BBB_PINOUT4.13@200,1450 360,1450 415,1505 415,1651 458,1694 779,1694 806,1667 1707,1667 1940,1900 BBB_DOWN.81@2892.91,1900
BBB_LCD_DATA13: BBB_DOWN.79 BBB_PINOUT4.14 | length 2916.2
  Bottom Layer w10: BBB_PINOUT4.14@200,1550 200,1583 457,1840 457,1870 481,1894 691,1894 747,1950 2691,1950 2741,2000 BBB_DOWN.79@2892.91,2000
BBB_LCD_DATA14: BBB_DOWN.77 BBB_PINOUT4.15 | length 3052.5
  Top Layer w10: BBB_PINOUT4.15@200,1650 256,1594 602,1594 755,1441 1253,1441 v1(1912,2100)
  Bottom Layer w10: v1(1912,2100) BBB_DOWN.77@2892.91,2100
BBB_LCD_DATA15: BBB_DOWN.78 BBB_PINOUT4.16 | length 3273.9
  Bottom Layer w10: BBB_PINOUT4.16@200,1750 271.49,1821.49 271.49,1993.49 378,2100 910,2100 944,2066 2983,2066 3017,2100 BBB_DOWN.78@3200,2100
BBB_LCD_HSYNC: BBB_DOWN.75 BBB_PINOUT4.19 | length 3592.5
  Bottom Layer w10: BBB_PINOUT4.19@200,2050 343,2193 519.53,2193 576.53,2136 3229,2136 3253,2160 3253,2233 3092,2233 3059,2200 BBB_DOWN.75@2892.91,2200
BBB_LCD_PCLK: BBB_DOWN.74 BBB_PINOUT4.17 | length 3596.6
  Top Layer w10: BBB_PINOUT4.17@200,1850 157,1893 157,1993 170,2006 v1(406,2006)
  Bottom Layer w10: v1(406,2006) 691,2006 719,2034 3225,2034 3271,2080 3271,2291 3262,2300 BBB_DOWN.74@3200,2300
BBB_LCD_VSYNC: BBB_DOWN.73 BBB_PINOUT4.18 | length 3475.9
  Top Layer w10: BBB_PINOUT4.18@200,1950 445,1705 705,1705 948,1462 1205,1462 1644,1901 v1(1644,2300)
  Bottom Layer w10: v1(1644,2300) BBB_DOWN.73@2892.91,2300
BBB_MMC1_CLK: BBB_DOWN.67 BBB_PINOUT2.16 | length 4061.4
  Top Layer w10: BBB_PINOUT2.16@500,4350 745,4350 1013,4082 1013,2614 1060,2567 1534,2567 v1(1567,2600)
  Bottom Layer w10: v1(1567,2600) 1635,2668 2200,2668 2268,2600 BBB_DOWN.67@2892.91,2600
BBB_MMC1_CMD: BBB_DOWN.66 BBB_PINOUT2.17 | length 4381.4
  Top Layer w10: BBB_PINOUT2.17@500,4450 1139,4450 1189,4400 v1(1189,2901)
  Bottom Layer w10: v1(1189,2901) 1250,2840 1250,2767 1651.38,2767 1669.43,2748.95 1708.88,2748.95 1751.93,2792 1831,2792 1858,2765 3115,2765 3180,2700 BBB_DOWN.66@3200,2700
BBB_MMC1_DAT0: BBB_DOWN.71 BBB_PINOUT2.12 | length 5337.1
  Bottom Layer w10: BBB_PINOUT2.12@500,3950 3030,3950 3832.83,3147.17 3832.83,2466.83 3770,2404 3431.37,2404 3402.69,2432.69 3144,2432.69 3111.31,2400 BBB_DOWN.71@2892.91,2400